# Altium PCB 2018_LedWhite.PcbDoc
Units mil, origin at the board's own origin, x right, y up, seen from the top; angles counter-clockwise.
Board outline 531.5 x 748.03 mil, 4 copper layers (1-TOP, 2-SIGNAL, 3-GND, 4-BOT), stack 68 mil thick; 8 components, 5 nets, 20 pads, 4 vias.
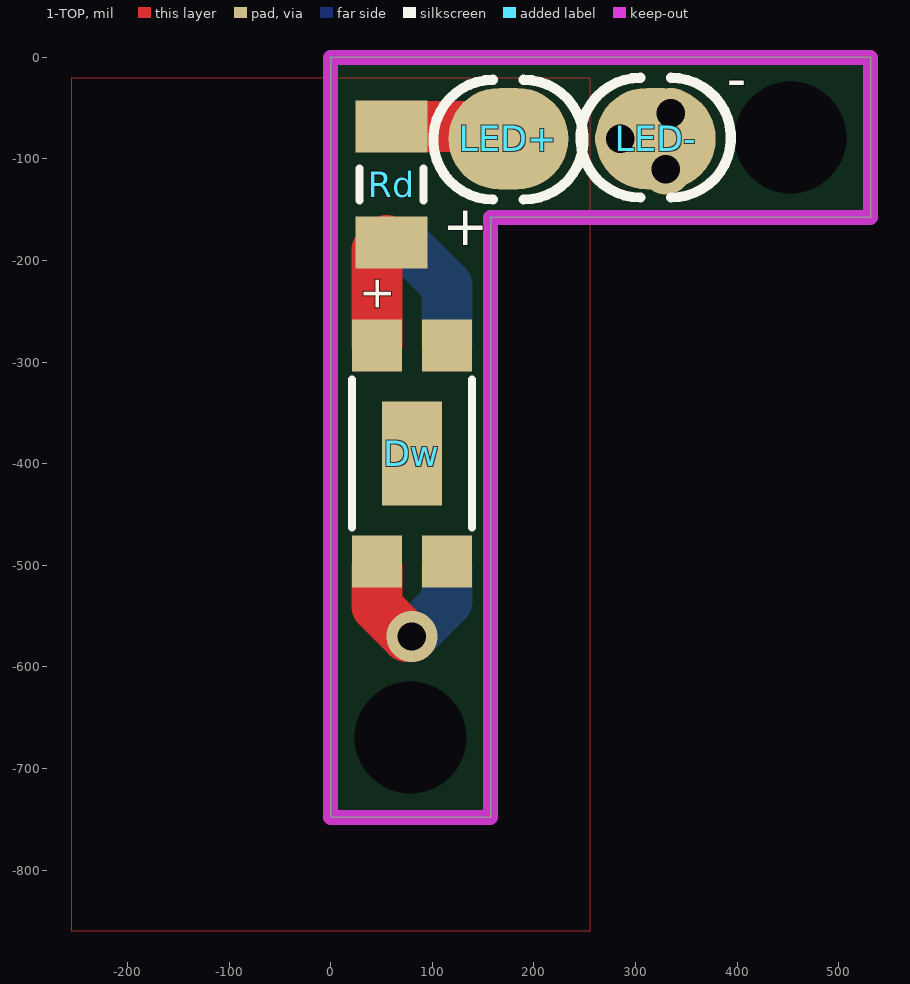
[diagram p0: 1-TOP view]
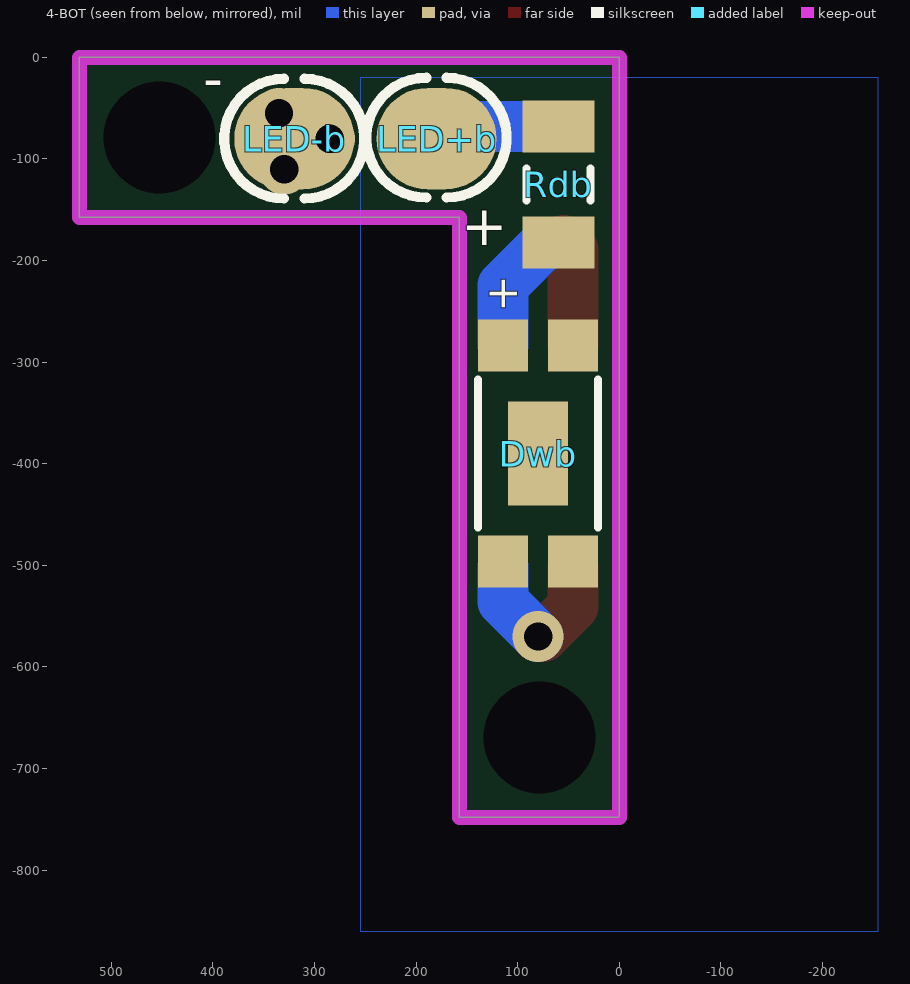
[diagram p1: 4-BOT view, seen from below]
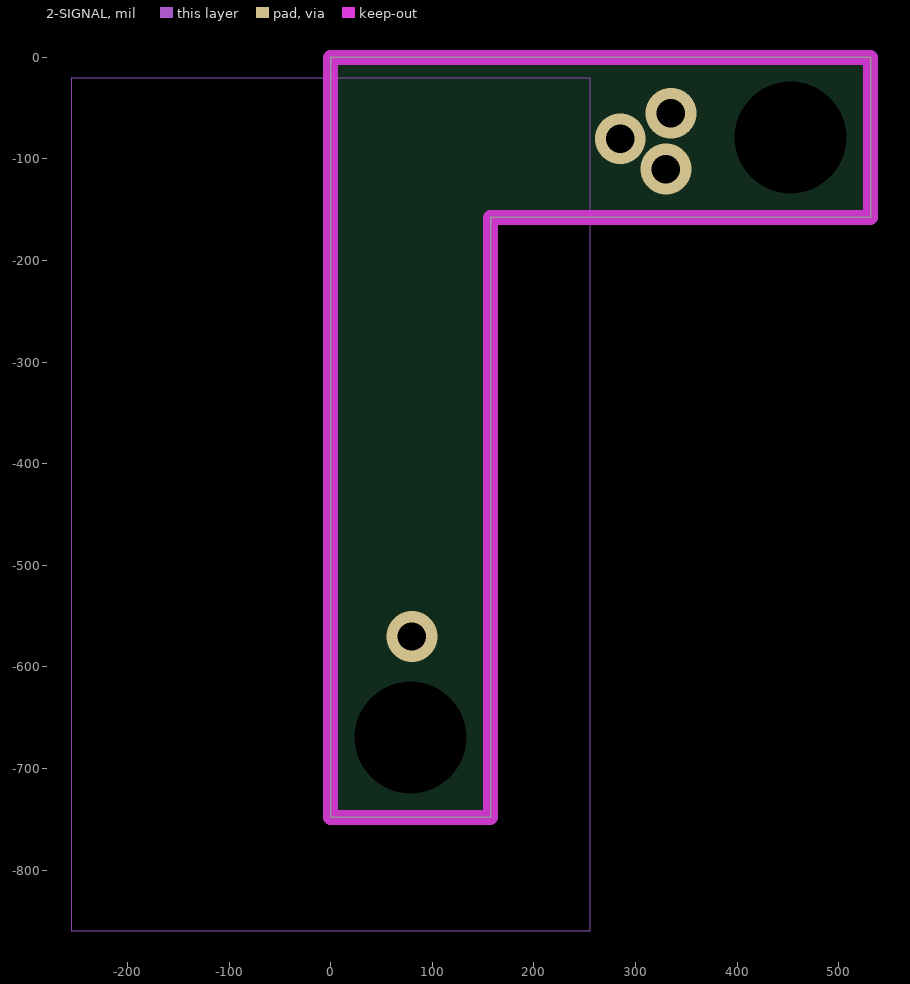
[diagram p2: 2-SIGNAL]
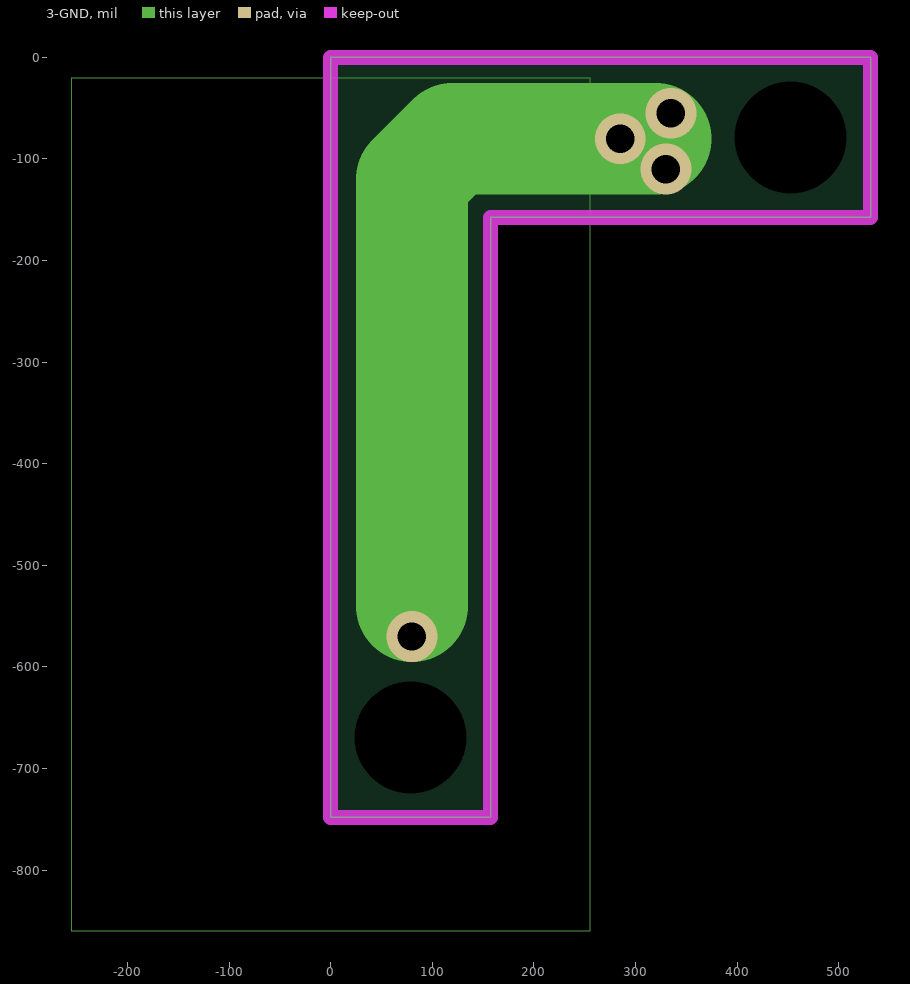
[diagram p3: 3-GND]

## Layer stack, top to bottom
Top Solder: solder mask 0.4, Solder Resist, Dk 3.5
1-TOP: signal copper 1.4
Dielectric1: core 20.8, FR-4, Dk 4.8
2-SIGNAL: signal copper 1.4
Dielectric2: prepreg 20.8, FR-4, Dk 4.8
3-GND: signal copper 1.4
Dielectric3: core 20.8, FR-4, Dk 4.8
4-BOT: signal copper 1.4
Bottom Solder: solder mask 0.4, Solder Resist, Dk 3.5

## Board outline
0,-748.03 157.48,-748.03 157.48,-157.48 531.5,-157.48 531.5,0 0,0

## Design rules (kind name [scope] priority, off if disabled: settings)
Clearance Clearance_4 [InNamedPolygon('GND_TOP') Or  InNamedPolygon('3-GND') Or  InNamedPolygon('2-GND') Or  InNamedPolygon('4-GND')] p1: gap=15
Clearance Clearance_3 [InNamedPolygon('4-GND') Or  InNamedPolygon('GND_TOP') Or  InNamedPolygon('2-GND') Or  InNamedPolygon('3-GND')] p2: gap=10
Clearance Clearance_2 [InNamedPolygon('4-GND') Or  InNamedPolygon('2-GND') Or  InNamedPolygon('3-GND') Or  InNamedPolygon('1-GND') Or  InNamedPolygon('2-GND24')] p3: gap=10
Clearance Clearance_1 [InNamedPolygon('2-GND') Or  InNamedPolygon('3-GND') Or  InNamedPolygon('1-GND') Or  InNamedPolygon('4-GND')] p4: gap=10
Clearance [All] p5: gap=7
FabricationTestpoint [(IsPad And (OnTopLayer Or OnBottomLayer))] p1: side=3 testpointundercomponent=TRUE minsize=40 maxsize=100 preferedsize=60 minholesize=0 maxholesize=40 preferedholesize=32 testpointgrid=1 allowsidetop=TRUE allowsidebottom=TRUE usegrid=TRUE gridtolerance=0.01
HoleSize [All] p1: absolutevalues=TRUE maxlimit=200 minlimit=1 maxpercent=80.000 minpercent=20.000
PlaneConnect [All] p1: planeconnectstyle=Direct reliefexpansion=20 reliefentries=4 reliefconductorwidth=10 reliefairgap=10
PolygonConnect [All] p1: connectstyle=Direct reliefconductorwidth=10 reliefentries=4 polygonreliefangle="90 Angle" airgapwidth=10
RoomDefinition 2018_LedWhite [InComponentClass('2018_LedWhite')] p1: confinementstyle=ConfineIn formatcopy=TRUE lockcomponents=FALSE outline 3234.92,-2391.14 2704.92,-2391.14 2704.92,-1841.14 3234.92,-1841.14
RoutingVias [All] p1: holewidth=28 width=50 viastyle="Through Hole" minholewidth=28 minwidth=50 maxholewidth=28 maxwidth=50
SilkToSolderMaskClearance SilkscreenOverComponentPads [IsPad] p1: minsilkscreentomaskgap=10 clearancetoexposedcopper=TRUE
SolderMaskExpansion [All] p1: expansion=4
Width [All] p1: maxlimit=200 minlimit=10 preferedwidth=15
25 further rules are at their usual default settings.

## Components (designator, comment, footprint, x,y, rotation, side; value= is the part's Value field where it differs from the comment)
Dw "158563460" WL-SWTP_5630 80,-390 r90 top
Dwb "158563460" WL-SWTP_5630 80,-390 r90 bottom
LED+ "Pad_CMS" PAD_CMS_5.08x2.54 175,-80 r0 top
LED+b "Pad_CMS" PAD_CMS_5.08x2.54 180,-80 r180 bottom
LED- "Pad_CMS" PAD_CMS_5.08x2.54 320,-80 r0 top
LED-b "Pad_CMS" PAD_CMS_5.08x2.54 320,-80 r180 bottom
Rd "15R / 0,5W" R1206_N 60,-125 r90 top
Rdb "15R / 0,5W" R1206_N 60,-125 r90 bottom

## Footprints (in the part's own frame and the unit in brackets; to place one, negate y for a bottom-side part, rotate by r counter-clockwise, add the part's x,y. Pads: shape width x height; smd on the part's side, far side on the other; paste and mask are expansions set on the pad)
PAD_CMS_5.08x2.54 [mm] "Pad pour souder un fil"
  oval 3x2.54 smd paste+0.005: 1(0,0)
  silkscreen extent -1.88,-1.52 1.88,1.47
R1206_N [mm] "Chip Resistor, Body 3.2x1.6mm, IPC Medium Density"
  rect 1.3x1.8 smd: 1(-1.45,0) 2(1.45,0)
  silkscreen extent -0.4,-0.8 0.4,0.8, body extent -1.68,-0.87 1.68,0.87, height 0.71
WL-SWTP_5630 [mm] "SMD White Top view PLCC, body 5.4x3.0"
  rect 1.3x1.25 smd: 1(-2.7,-0.875) 2(2.7,-0.875) 3(2.7,0.875) 4(-2.7,0.875)
  rect 2.6x1.5 smd: 5(0,0)
  silkscreen extent -1.85,-1.5 1.85,1.5, body extent -2.85,-1.5 2.85,1.5, height 0.92

## Part data
Dw Dwb: "WL-SWTP SMD White Top view PLCC, size 5630, Cool White"
LED+ LED+b LED- LED-b: "Pad pour souder un fil"
Rd Rdb: library part Resistor, "Resistor"

## Free pads (board coordinates)
  round 60 hole 110.24: 0(78.74,-669.29) 0(452.76,-78.74)

## Via types
v1: diameter 50, hole 28, 1-TOP to 4-BOT, 4 vias

## Nets (pads, with @x,y where several pads share a name; then routed paths per layer and width w, separated by ;. In a path a pad name is that pad's centre, name@x,y a point inside that pad or via, vN(x,y) a via of type N, cw(c..) or ccw(c..) an arc to the next point about the centre after c; other vN are vias at no path point)
GND: Dw.4 Dwb.4 LED-.1 LED-b.1 | length 840.4
  1-TOP w50: Dw.4@45.55,-501.3 45.55,-540.55 v1@75,-570
  3-GND w110: 80,-540 80,-120 120,-80 320,-80
  4-BOT w50: v1(80,-570) 114.45,-535.55 Dwb.4@114.45,-501.3
  other v1: 330,-110 285,-80 335,-55
NetDw_3: Dw.3 Rd.1 | length 107.6
  1-TOP w50: Dw.3 45.55,-189.45 Rd.1@55,-180
NetDwb_3: Dwb.3 Rdb.1 | length 115
  4-BOT w50: Rdb.1@75,-185 114.45,-224.45 Dwb.3
VLED: LED+.1 Rd.2 | length 97.9
  1-TOP w50: Rd.2 LED+.1@157.91,-67.91
VLEDB: LED+b.1 Rdb.2 | length 97.9
  4-BOT w50: Rdb.2 LED+b.1@157.91,-67.91
pads on no net: Dw.1 Dw.2 Dw.5 Dwb.1 Dwb.2 Dwb.5

## Polygon pours and split planes (outlines as drawn)
GND on 4-BOT "4-GND" (solid, shelved, pour order 8): -255,-20 255,-20 255,-860 -255,-860
GND on 3-GND "3-GND" (solid, shelved, pour order 9): -255,-20 255,-20 255,-860 -255,-860
GND on 2-SIGNAL "2-GND" (solid, shelved, pour order 10): -255,-20 255,-20 255,-860 -255,-860
GND on 1-TOP "GND_TOP" (solid, shelved, pour order 11): -255,-20 255,-20 255,-860 -255,-860

## Keep-outs
Keep-Out Layer:
  the board outline again, w15

## Silkscreen, mask and mechanical layers (free items; w line width, h text height)
Top Overlay:
  text "-" at 390,-40 h40
  text "+" at 110,-185 h40
Bottom Overlay:
  text "-" at 390,-40 h40
  text "+" at 110,-185 h40

## Text inside footprints (layer, text, board x,y; h text height)
Dw: Top Overlay "+" at 59.53,-251.02 h31.5 r90
Dwb: Bottom Overlay "+" at 100.47,-251.02 h31.5 r270